# Altium PCB PUMP_MODULE_20230110.PcbDoc (part 3 of 6)
Units mm, origin at the board's own origin, x right, y up, seen from the top; angles counter-clockwise.
Board outline 260.15 x 142.01 mm, 4 copper layers (Top Layer, Mid-Layer 1, Mid-Layer 2, Bottom Layer); 422 components, 240 nets, 1746 pads, 416 vias.
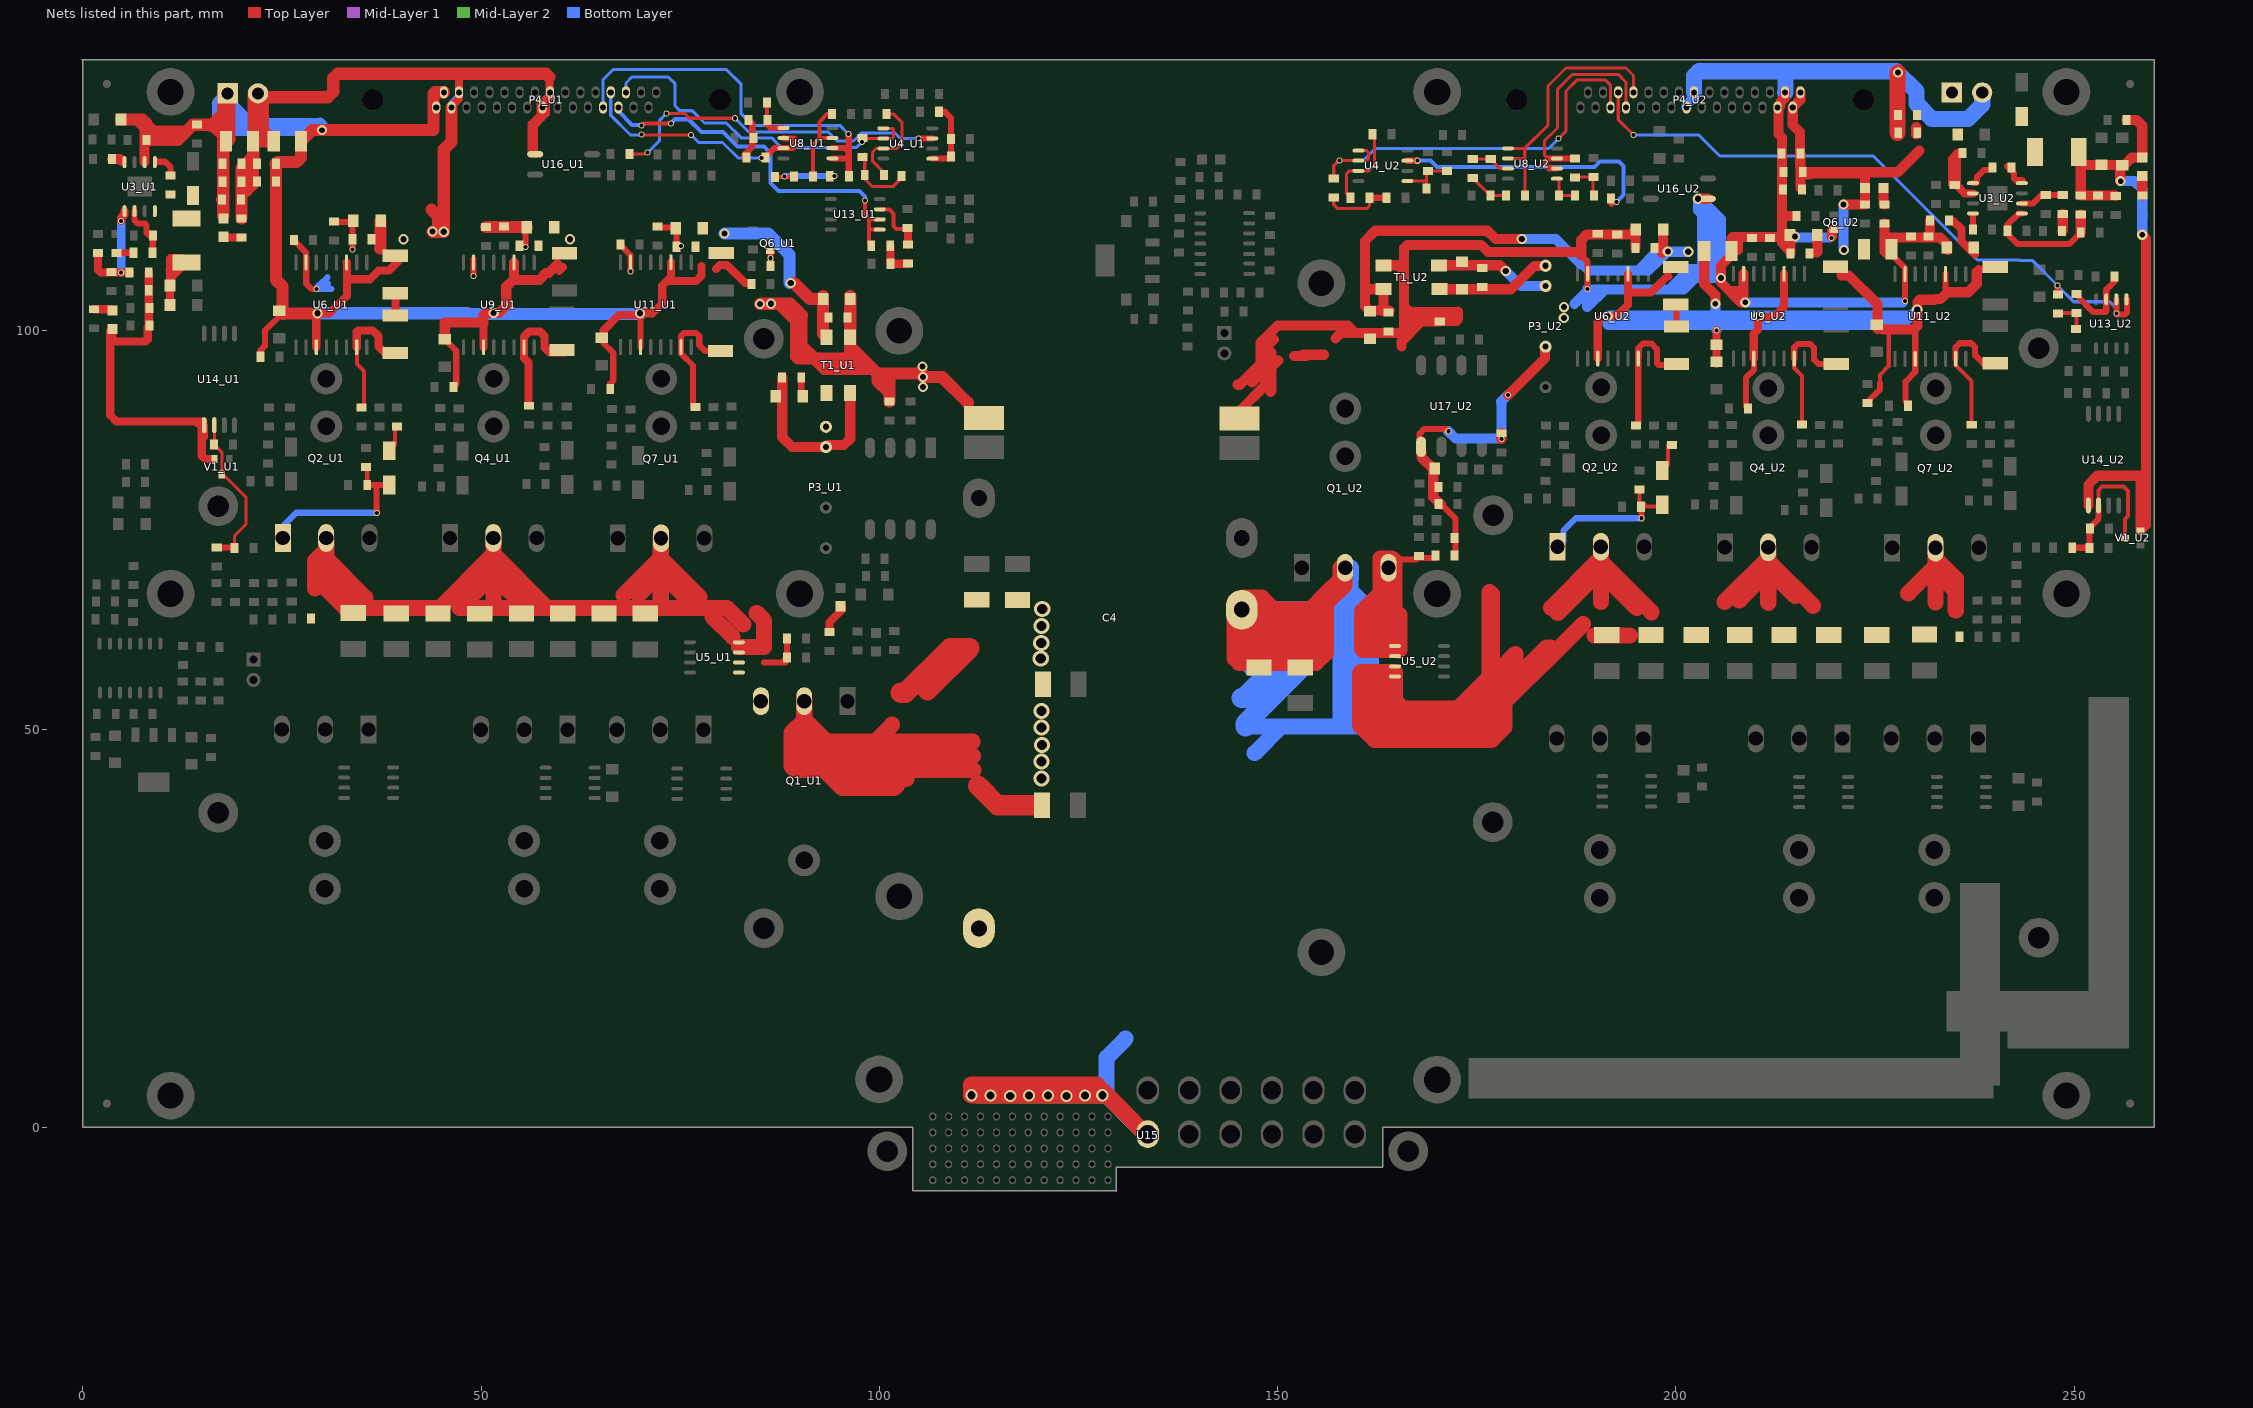
[diagram p5: the nets of this part, all layers, seen from the top]

## Via types
v1: diameter 0.762, hole 0.508, Top Layer to Bottom Layer, 208 vias
v2: diameter 2.032, hole 1.27, Top Layer to Bottom Layer, 78 vias
v3: diameter 1.27, hole 0.762, Top Layer to Bottom Layer, 61 vias
v4: diameter 1.524, hole 1.016, Top Layer to Bottom Layer, 53 vias
v5: diameter 1.27, hole 0.711, Top Layer to Bottom Layer, 16 vias

## Nets (pads, with @x,y where several pads share a name; then routed paths per layer and width w, separated by ;. In a path a pad name is that pad's centre, name@x,y a point inside that pad or via, vN(x,y) a via of type N, cw(c..) or ccw(c..) an arc to the next point about the centre after c; other vN are vias at no path point) (continued)
GND_HVISO_U2: C38_U2.2 C39_U2.2 C40_U2.2 P3_U2.3 R18_U2.2 R34_U2.2 R46_U2.1 U17_U2.5 | length 41.8
  Top Layer w0.762: U17_U2.5@167.818,84.963 167.818,87.097 168.427,87.706 171.12,87.706 v1(171.425,87.401) ; C39_U2.2@170.51,78.181 170.586,78.181 172.339,76.429 R18_U2.2@172.339,72.252
  Top Layer w1.27: U17_U2.5@168.046,84.734 168.046,84.15 169.647,82.55 169.545,82.448 169.545,79.146 C39_U2.2@170.51,78.181 ; v1(178.105,86.436) 178.079,86.462 178.079,86.614 178.105,86.639 R34_U2.2@178.105,87.147 ; v1(178.943,91.948) 183.591,96.596 P3_U2.3@183.591,97.993
  Bottom Layer w1.27: v1(171.425,87.401) 172.339,86.487 177.546,86.487 178.105,87.046 178.105,91.059 178.054,91.11 178.892,91.948 v1(178.943,91.948)
HVCC_IN: C4.1 C17.2 C18.2 C73.2 C74.2 C75.2 C76.2 Q1_U1.2 Q1_U2.2 U15.7 | length 548.8
  Top Layer w2.032: Q1_U1.2@90.572,53.619 Q1_U1.2@90.572,53.518 90.572,51.236 ; 101.6,50.546 99.466,48.412 ; 102.286,43.028 101.854,42.596 95.377,42.596 94.234,43.739 ; 103.378,43.739 94.234,43.739 ; 111.684,48.412 99.466,48.412 ; 111.735,46.634 91.948,46.634 ; 111.785,44.856 93.167,44.856 ; 112.37,4.039 v4(111.557,4.039) v4@111.531,4.013 ; v4@116.713,4.039 119.736,4.039 ; v4@118.745,4.394 118.77,4.394 119.024,4.14 119.837,4.14 ; 121.641,5.41 121.666,5.385 ; v4@123.749,4.039 119.736,4.039 ; 126.797,4.039 v4(127.991,4.039) v4@128.566,4.039 ; v4@128.422,4.14 v4@127.991,4.14 ; U15.7@133.741,-0.837 U15.7@133.7,-0.837 U15.7@133.527,-0.837 ; Q1_U2.2@157.916,70.256 157.916,68.838 156.058,66.98 ; Q1_U2.2@158.475,70.256 158.394,70.176 158.394,68.072 156.058,65.735 ; 88.976,46.812 88.976,49.53 90.572,51.126 ; 88.976,46.812 88.976,45.339 89.459,44.856 90.932,44.856 ; 88.976,46.812 90.932,44.856 ; 90.572,47.68 90.572,47.452 91.948,46.076 ; 90.572,47.68 91.618,46.634 91.948,46.634 ; 90.572,47.68 90.572,49.788 ; 90.572,49.788 90.572,51.126 ; 90.572,49.788 91.948,48.412 ; 90.572,51.126 90.572,51.236 ; 90.572,51.236 93.396,48.412 ; 90.932,44.856 93.116,44.856 ; 91.948,46.076 93.167,44.856 ; 91.948,46.076 91.948,46.634 ; 91.948,46.076 91.948,46.025 93.116,44.856 ; 91.948,46.634 91.948,48.412 ; 91.948,48.412 93.396,48.412 ; 93.116,44.856 94.234,43.739 ; 93.116,44.856 93.167,44.856 ; 93.396,48.412 99.466,48.412 ; v4@111.531,4.013 v4(113.944,4.013) v4(125.806,4.013) 126.619,4.013 v4@126.492,4.14 ; v4@111.531,4.013 111.531,5.385 121.666,5.385 ; 119.736,4.039 119.837,4.14 ; 119.837,4.14 v4@122.911,4.14 ; 121.666,5.385 126.746,5.385 ; 121.666,5.385 v4@122.911,4.14 ; v4@122.911,4.14 v4@126.492,4.14 ; v4@126.492,4.14 v4@127.991,4.14 ; 126.746,5.385 v4@127.991,4.14 ; 126.746,5.385 127.305,5.385 v4@128.651,4.039 ; v4@128.566,4.039 v4@128.651,4.039 ; v4@128.566,4.039 133.442,-0.837 U15.7@133.527,-0.837 ; v4@128.651,4.039 U15.7@133.527,-0.837 ; 144.628,60.96 144.628,58.877 145.186,58.318 154.813,58.318 156.058,59.563 156.058,61.087 ; 144.628,60.96 144.628,64.128 C4.1@145.5,65 ; 144.628,60.96 146.075,59.512 154.28,59.512 154.381,59.411 156.058,61.087 ; C4.1@145.5,63.771 C4.1@145.5,65 ; C4.1@145.5,63.771 145.5,62.399 146.355,61.544 154.635,61.544 156.058,62.967 ; C4.1@145.5,63.771 145.847,63.424 154.864,63.424 156.058,64.618 ; C4.1@145.5,65 149.53,65 ; C4.1@145.5,65 145.5,66.328 145.694,66.523 148.007,66.523 149.53,65 ; 149.53,65 154.078,65 156.058,66.98 ; 156.058,61.087 156.058,62.967 ; 156.058,62.967 156.058,64.618 ; 156.058,64.618 156.058,65.735 ; 156.058,65.735 156.058,66.98
  Top Layer w2.54: 102.692,54.534 102.667,54.559 103.276,54.559 108.89,60.173 111.328,60.173 106.045,54.889 ; 112.395,42.901 114.833,40.462 C76.2@119.913,40.462
  Mid-Layer 1 w2.032: v4@121.717,4.166 121.742,4.14 128.464,4.14 130.461,2.143 130.461,2.127 133.425,-0.837 U15.7@133.7,-0.837 U15.7@133.741,-0.837
  Mid-Layer 2 w2.032: v4@111.76,4.699 125.628,4.699 126.187,4.14 v4@127.94,4.14 ; v4@111.912,4.496 112.37,4.039 v4(127.991,4.039) 128.566,4.039 130.461,2.143 130.461,2.101 133.4,-0.837 U15.7@133.7,-0.837 U15.7@133.741,-0.837 ; 112.09,5.334 126.746,5.334 v4@127.94,4.14 ; v4@128.422,4.14 v4@127.94,4.14
  Bottom Layer w2.032: v4(127.991,4.039) v4@128.525,4.039 ; 130.912,11.151 128.525,8.764 v4@128.525,4.039 ; U15.7@133.7,-0.837 133.4,-0.837 v4@128.525,4.039 ; 145.974,50.343 150.47,50.343 ; 147.117,46.99 150.47,50.343 ; 147.701,61.468 153.34,61.468 154.991,61.468 157.916,64.393 ; 147.777,59.817 147.777,59.842 151.714,59.842 155.092,59.842 155.575,59.842 157.916,62.184 ; 158.043,68.449 Q1_U2.2@158.043,70.256 ; Q1_U2.2@159.182,70.256 159.182,68.991 159.156,69.016 159.156,67.335 159.842,66.65 ; 150.47,50.343 157.302,50.343 ; 157.302,50.343 158.75,50.343 ; 157.302,50.343 157.916,50.957 157.916,62.184 ; 157.916,62.184 157.916,64.393 ; 157.916,64.393 157.916,66.984 ; 157.916,66.984 157.916,68.102 154.814,65 C4.1@145.5,65 147.203,63.297 154.229,63.297 157.916,66.984 ; 158.75,50.343 161.138,50.343 161.722,50.927 161.722,64.77 159.842,66.65 ; 158.75,50.343 159.842,51.435 159.842,66.65
  Bottom Layer w2.54: 145.466,53.899 145.771,53.899 149.835,57.963 ; 145.974,50.343 145.974,50.724 155.092,59.842 ; 146.812,57.963 149.835,57.963 ; 153.34,61.468 151.714,59.842 149.835,57.963
  other v2: 120.345,43.815 120.345,45.923 120.421,48.006 120.371,50.19 120.371,52.299 120.269,58.852 120.32,60.808 120.345,62.967 120.447,65.1
  other v4: 116.434,3.962 123.495,3.962 118.796,3.988 121.158,3.988
HVCC_U1: C15_U1.2 C16_U1.2 C20_U1.2 C70_U1.2 C71_U1.2 C72_U1.2 C77_U1.2 C78_U1.2 Q2_U1.2 Q4_U1.2 Q7_U1.2 R74_U1.2 U5_U1.3 U5_U1.4 | length 159.1
  Top Layer w2.032: Q2_U1.2@30.56,74 Q2_U1.2@30.56,72.517 ; 33.604,66.497 30.56,69.541 ; 35.484,66.497 30.56,71.421 ; Q4_U1.2@51.56,74 51.56,71.935 ; 67.894,66.853 72.56,71.519 ; 69.774,66.878 72.56,69.664 ; Q7_U1.2@72.56,74 72.56,71.519 ; 76.048,66.269 72.56,69.756 ; 77.419,66.573 72.56,71.433 ; 79.045,64.135 81.585,61.595 ; 82.423,60.3 85.522,60.3 85.522,63.652 84.582,64.592 ; 82.906,63.17 80.848,65.227 72.644,65.227 ; 30.56,69.041 30.56,69.541 ; 30.56,69.041 30.56,67.611 32.944,65.227 44.856,65.227 51.56,71.931 ; 30.56,69.041 29.159,67.64 29.159,71.116 Q2_U1.2@30.56,72.517 ; 30.56,69.541 30.56,71.421 ; 30.56,71.421 Q2_U1.2@30.56,72.517 ; 51.56,69.344 51.56,65.483 51.816,65.227 ; 51.56,69.344 C72_U1.2@55.677,65.227 ; 51.56,69.344 51.56,69.492 ; 51.56,69.492 51.56,71.931 ; 51.56,69.492 47.295,65.227 51.816,65.227 ; 51.56,71.931 51.56,71.935 ; 51.56,71.935 58.268,65.227 ; 51.816,65.227 C72_U1.2@55.677,65.227 ; C72_U1.2@55.677,65.227 58.268,65.227 ; 58.268,65.227 72.644,65.227 ; 72.56,69.664 72.56,69.756 ; 72.56,69.664 72.56,65.311 72.644,65.227 ; 72.56,69.756 72.56,71.433 ; 72.56,71.433 72.56,71.519
HVCC_U2: C15_U2.2 C16_U2.2 C20_U2.2 C70_U2.2 C71_U2.2 C72_U2.2 C77_U2.2 C78_U2.2 Q2_U2.2 Q4_U2.2 Q7_U2.2 R74_U2.2 U5_U2.3 U5_U2.4 | length 255.8
  Top Layer w2.032: 172.822,52.73 175.514,55.423 ; 174.142,52.73 175.514,54.102 175.514,55.423 ; 174.6,51.054 176.581,53.035 ; 176.047,52.553 165.76,52.553 164.744,53.569 U5_U2.4@164.744,56.617 164.744,57.15 163.271,57.15 ; 176.505,50.876 178.283,52.654 ; 183.248,58.102 188.341,63.195 ; 184.252,60.249 183.794,60.249 179.857,56.312 ; 184.353,65.253 Q2_U2.2@190.601,71.501 ; 184.506,59.411 178.46,53.365 178.46,50.241 176.886,48.666 174.295,48.666 ; 185.166,64.567 190.601,70.002 ; C16_U2.2@189.763,61.747 194.208,61.747 ; 190.601,65.964 190.601,69.723 ; Q2_U2.2@190.601,72.83 Q2_U2.2@190.601,71.501 ; 195.123,65.202 190.601,69.723 ; 196.952,64.668 190.601,71.019 ; 206.096,65.964 Q4_U2.2@211.601,71.47 ; 207.95,66.167 211.601,69.819 ; Q4_U2.2@211.601,72.83 Q4_U2.2@211.601,71.47 ; 211.633,65.862 211.601,65.894 211.601,69.819 ; 215.011,66.7 211.601,70.11 ; 217.221,65.481 Q4_U2.2@211.601,71.101 ; 229.184,67.031 229.159,67.056 232.601,70.499 ; 232.588,65.938 232.601,65.952 232.601,69.862 ; Q7_U2.2@232.601,72.83 Q7_U2.2@232.601,71.411 ; 235.052,67.412 232.601,69.862 ; 235.128,64.897 235.128,68.885 Q7_U2.2@232.601,71.411 ; 161.036,49.809 162.179,48.666 164.694,48.666 ; 161.036,49.809 163.551,49.809 ; 161.036,49.809 160.35,50.495 160.35,57.023 160.477,57.15 161.747,57.15 ; 161.747,57.15 161.417,56.82 161.417,51.943 163.551,49.809 ; 161.747,57.15 163.271,57.15 ; 163.271,57.15 163.271,52.248 164.871,50.648 176.276,50.648 174.295,48.666 ; 163.551,49.809 164.694,48.666 ; 164.694,48.666 174.295,48.666 ; 175.514,55.423 176.581,56.49 ; 176.581,53.035 176.581,56.49 ; 176.581,53.035 178.079,54.534 ; 176.581,56.49 176.911,56.82 176.911,66.904 176.581,67.234 176.581,56.49 ; 178.079,54.534 179.857,56.312 ; 178.079,54.534 178.079,57.658 179.857,59.436 179.857,56.312 ; 190.601,69.723 190.601,70.002 ; 190.601,70.002 190.601,71.019 ; 190.601,71.019 Q2_U2.2@190.601,71.501 ; 211.601,69.819 211.601,70.11 ; 211.601,70.11 Q4_U2.2@211.601,71.101 ; Q4_U2.2@211.601,71.101 Q4_U2.2@211.601,71.47 ; 232.601,69.862 232.601,70.499 ; 232.601,70.499 Q7_U2.2@232.601,71.411
HVCCIN_U1: Q1_U1.3 R15_U1.1 R18_U1.1 U5_U1.1 U5_U1.2 | length 6
  Top Layer w0.762: 85.547,58.344 87.757,58.344 ; 88.189,58.344 87.757,58.344 ; R18_U1.1@88.417,61.392 R15_U1.1@88.417,59.004 87.757,58.344
HVCCIN_U2: Q1_U2.3 R15_U2.1 R18_U2.1 U5_U2.1 U5_U2.2 | length 66.2
  Top Layer w0.762: Q1_U2.3@163.356,70.256 164.423,71.323 R15_U2.1@167.411,71.323 ; R15_U2.1@167.361,71.526 167.386,71.501 R18_U2.1@169.774,71.501
  Top Layer w2.032: Q1_U2.3@163.297,69.901 163.297,67.462 162.916,67.081 ; Q1_U2.3@163.356,70.256 163.356,66.26 ; Q1_U2.3@163.483,70.256 Q1_U2.3@163.944,69.795 ; 161.722,59.969 160.757,59.969 160.63,60.096 160.63,64.795 162.916,67.081 ; 161.722,59.969 163.525,59.969 ; 161.722,59.969 161.671,60.02 161.671,64.592 163.347,66.269 ; 162.916,67.081 162.916,71.425 164.321,71.425 164.423,71.323 164.643,71.103 Q1_U2.3@164.643,69.097 ; 162.916,67.081 162.916,66.7 163.347,66.269 ; 163.347,66.269 163.347,60.147 163.525,59.969 ; 163.347,66.269 163.356,66.26 ; 163.356,66.26 163.944,65.672 ; 163.525,59.969 165.151,59.969 165.227,59.893 165.261,59.927 165.261,64.355 164.643,64.973 ; 163.944,65.672 164.643,64.973 ; 163.944,65.672 Q1_U2.3@163.944,69.795 ; Q1_U2.3@163.944,69.795 Q1_U2.3@164.643,69.097 ; 164.643,64.973 Q1_U2.3@164.643,69.097
II_1_AC1_U1: C45_U1.2 P4_U1.12 U8_U1.1 U8_U1.2 | length 50
  Top Layer w0.762: U8_U1.1@94.107,121.666 96.164,121.666 ; U8_U1.2@94.107,122.936 95.733,122.936 96.164,122.504 ; v1(96.139,124.714) 96.164,124.689 96.164,122.504 ; C45_U1.2@96.164,119.405 96.164,121.666 ; 96.164,121.666 96.164,122.504
  Bottom Layer w0.381: P4_U1.12@65.329,128.047 65.329,131.546 66.573,132.791 80.823,132.791 82.652,130.962 82.652,127.254 84.099,125.806 95.047,125.806 v1(96.139,124.714)
II_1_AC1_U2: C45_U2.2 P4_U2.12 U8_U2.1 U8_U2.2 | length 33.3
  Top Layer w0.381: U8_U2.2@178.918,121.641 181.026,121.641 ; U8_U2.1@178.918,122.911 181.026,122.911 ; C45_U2.2@181.077,116.992 181.077,121.996 181.026,122.047 181.026,122.911 ; P4_U2.12@194.668,129.952 194.668,132.052 193.726,132.994 186.207,132.994 183.947,130.734 183.947,125.832 181.026,122.911
II_1_AC2_U1: C48_U1.2 P4_U1.27 U8_U1.6 U8_U1.7 | length 31
  Top Layer w0.381: v1(70.155,124.663) 70.206,124.612 73.558,124.612 ; 73.584,124.587 73.558,124.612 ; v1@76.352,124.562 76.302,124.612 73.558,124.612
  Top Layer w0.762: C48_U1.2@85.471,121.691 85.573,121.691 86.817,122.936 U8_U1.7@87.96,122.936 89.103,122.936 89.332,123.165 89.332,124.054 89.306,124.079 89.306,124.155 88.011,124.155 U8_U1.6@87.96,124.206
  Bottom Layer w0.381: P4_U1.27@66.281,129.952 66.282,127.063 68.758,124.587 v1@70.155,124.587 ; v1(76.352,124.612) 77.318,123.647 80.315,123.647 82.271,121.691 v1(85.192,121.691)
II_1_AC2_U2: C48_U2.2 P4_U2.27 U8_U2.6 U8_U2.7 | length 28.4
  Top Layer w0.381: 183.972,121.641 183.947,121.641 183.49,122.098 183.49,123.825 185.141,125.476 185.141,130.327 187.02,132.207 192.761,132.207 193.716,131.252 P4_U2.27@193.716,128.047
  Top Layer w0.762: U8_U2.6@185.064,120.371 184.099,120.371 183.718,120.752 183.718,121.387 183.972,121.641 U8_U2.7@185.064,121.641 187.3,121.641 C48_U2.2@187.325,121.666
II_1_AC3_U1: C61_U1.2 P4_U1.13 U13_U1.1 U13_U1.2 | length 48.1
  Top Layer w0.508: v1(70.155,125.806) 70.383,126.035 73.838,126.035 v1(73.838,126.06) ; v1(98.222,116.357) 98.222,114.605 98.831,113.995 ; C61_U1.2@98.984,110.693 98.679,110.998 98.679,112.7 ; U13_U1.1@100.051,112.725 98.704,112.725 98.679,112.7 ; U13_U1.2@100.051,113.995 98.831,113.995 ; 98.679,112.7 98.679,113.843 98.831,113.995
  Bottom Layer w0.508: P4_U1.13@67.234,128.047 67.234,127.584 68.961,125.857 70.104,125.857 v1@70.206,125.755 ; v1@73.838,126.035 74.371,126.568 76.048,126.568 77.673,124.943 80.391,124.943 82.182,123.152 85.534,123.152 86.335,122.352 86.335,118.593 87.351,117.577 97.536,117.577 98.222,116.891 v1(98.222,116.357)
II_1_AC3_U2: C61_U2.2 P4_U2.13 U13_U2.1 U13_U2.2 | length 82.6
  Top Layer w0.381: P4_U2.13@192.763,129.952 192.763,126.515 v1(194.691,124.587) v1@194.615,124.663
  Top Layer w0.762: v1(247.904,105.689) 247.904,104.597 C61_U2.2@247.955,104.546 ; U13_U2.2@255.295,103.962 v1(255.295,102.184) 255.397,102.083 256.388,102.083 256.616,102.311 256.616,103.911 U13_U2.1@256.565,103.962
  Bottom Layer w0.381: v1(194.691,124.587) 202.87,124.587 205.511,121.945 ; 205.537,121.945 224.79,121.945 237.846,108.89 243.129,108.89 243.154,108.864 244.729,108.864 v1(247.904,105.689) 249.936,103.657 254.457,103.657 255.295,102.819 v1(255.295,102.184)
  Bottom Layer w0.762: v1@247.879,105.664 v1(247.904,105.689)
II_1_DC1_U1: C31_U1.2 P4_U1.28 U4_U1.1 U4_U1.2 | length 42.7
  Top Layer w0.381: C31_U1.2@98.222,124.155 U4_U1.2@100.508,124.155 101.625,124.155 101.778,124.308 101.778,125.349 101.702,125.425 U4_U1.1@100.508,125.425
  Bottom Layer w0.381: P4_U1.28@68.186,129.952 68.186,131.127 68.936,131.877 73.508,131.877 74.371,131.013 74.371,128.27 74.346,128.245 74.955,127.635 76.505,127.635 78.054,126.086 80.797,126.086 82.652,124.231 86.487,124.231 87.02,123.698 87.681,123.038 97.155,123.038 v1(97.815,123.698)
II_1_DC1_U2: C31_U2.2 P4_U2.28 U4_U2.1 U4_U2.2 | length 52.9
  Top Layer w0.381: C31_U2.2@157.048,119.126 157.048,120.726 157.683,121.361 U4_U2.2@160.147,121.361 160.172,121.387 161.239,121.387 161.417,121.564 161.417,122.403 161.188,122.631 U4_U2.1@160.147,122.631 U4_U2.1@160.223,122.707 ; v1(185.268,124.13) 186.207,125.07 186.207,125.832 ; 186.182,125.806 186.207,125.832 ; P4_U2.28@191.811,128.047 191.811,130.846 191.186,131.47 187.554,131.47 186.207,130.124 186.207,125.832
  Bottom Layer w0.381: v1(157.785,121.387) 160.757,121.387 162.255,122.885 184.023,122.885 v1(185.268,124.13)
II_FLT_U1: R86_U1.1 U4_U1.7 | length 43.6
  Top Layer w0.381: R86_U1.1@68.656,122.199 70.51,122.199 v1@70.752,122.441 ; v1(73.279,127.305) 75.54,127.305 76.149,126.695 v1(81.89,126.695)
  Top Layer w0.762: v1(104.902,124.155) U4_U1.7@106.655,124.155
  Bottom Layer w0.381: v1(70.891,122.377) 72.415,123.901 72.415,126.441 v1(73.279,127.305) ; v1(81.89,126.695) 83.617,124.968 93.574,124.968 94.691,123.85 96.749,123.85 97.739,124.841 101.168,124.841 101.956,124.841 102.641,124.155 v1(104.902,124.155)
II_FLT_U2: R86_U2.1 U4_U2.7 | length 33.6
  Top Layer w0.762: U4_U2.7@166.294,121.361 v1(167.538,121.361) ; 191.922,115.926 192.176,116.18 v1(192.557,116.18)
  Bottom Layer w0.508: v1(167.538,121.361) 169.215,121.361 170.002,120.574 189.763,120.574 190.449,121.26 192.862,121.26 193.421,120.701 193.421,117.043 v1(192.557,116.18)
ISO_+5V_U1: C21_U1.1 C22_U1.1 C23_U1.1 C29_U1.2 C30_U1.2 D3_U1.1 L1_U1.1 R20_U1.2 U14_U1.1 V1_U1.2 | length 56.4
  Top Layer w1.016: C23_U1.1@8.28,107.315 R20_U1.2@8.28,105.105 8.28,100.787 C30_U1.2@8.382,100.686 8.153,100.457 8.153,98.933 7.899,98.679 3.912,98.679 3.708,98.882 D3_U1.1@3.708,100.228 3.454,99.974 3.454,89.408 4.242,88.621 14.224,88.621 ; 10.922,107.721 10.947,107.696 ; C22_U1.1@10.947,103.251 C21_U1.1@10.947,105.715 10.947,106.68 ; U14_U1.1@15.164,88.621 14.224,88.621 ; U14_U1.1@15.189,88.113 15.189,86.665 14.935,86.411 ; V1_U1.2@16.281,83.896 15.342,83.896 14.935,84.303 14.935,86.411 ; 10.947,106.68 10.947,107.696 ; 10.947,106.68 11.074,106.68 L1_U1.1@13.005,108.61 12.497,109.118 10.998,109.118 10.947,109.068 10.947,107.696 ; 14.224,88.621 14.935,87.909 14.935,86.411
ISO_+5V_U2: C21_U2.1 C22_U2.1 C23_U2.1 C29_U2.2 C30_U2.2 D3_U2.1 L1_U2.1 R20_U2.2 U14_U2.1 V1_U2.2 | length 94
  Top Layer w0.508: 253.34,81.509 257.785,81.509
  Top Layer w1.27: L1_U2.1@250.571,122.479 250.571,121.361 L1_U2.1@250.825,121.107 ; U14_U2.1@251.79,78.08 251.79,80.721 252.882,81.813 258.318,81.813 V1_U2.2@258.318,74.955 259.007,75.644 259.007,111.605 v5(258.547,112.065) ; C29_U2.2@255.219,116.942 255.143,117.018 C23_U2.1@250.825,117.018 L1_U2.1@250.825,121.107 ; v5(255.829,118.796) 255.778,118.847 255.778,120.548 C22_U2.1@256.032,120.802 ; C30_U2.2@256.565,126.492 257.81,126.492 258.547,125.755 D3_U2.1@258.547,121.742 257.226,121.742 256.311,120.828 C21_U2.1@253.416,120.828 251.104,120.828 L1_U2.1@250.825,121.107
  Bottom Layer w1.27: v5(255.829,118.796) 257.556,118.796 258.547,117.805 v5(258.547,112.065)
ISO_+15V_U1: C5_U1.1 C6_U1.1 C7_U1.2 C8_U1.2 C9_U1.2 C10_U1.2 C11_U1.2 C19_U1.1 C24_U1.1 C25_U1.2 C34_U1.1 C35_U1.1 C41_U1.1 C42_U1.1 C43_U1.1 C44_U1.1 C49_U1.1 C50_U1.1 C51_U1.1 C52_U1.1 C66_U1.1 C67_U1.1 C68_U1.1 D1_U1.1 D6_U1.1 D11_U1.1 D16_U1.1 P2_U1.1 P4_U1.1 P4_U1.16 R17_U1.1 R51_U1.2 T1_U1.2 U3_U1.2 U6_U1.3 U6_U1.11 U9_U1.3 U9_U1.11 U11_U1.3 U11_U1.11 | length 314.3
  Top Layer w0.762: C68_U1.1@22.327,96.749 22.327,97.587 22.86,98.12 22.86,100.025 25.019,102.184 C43_U1.1@25.095,102.184 ; C51_U1.1@45.441,98.933 46.888,97.485 46.888,93.32 C44_U1.1@46.533,92.964 ; C19_U1.1@65.354,99.162 65.354,98.476 66.599,97.231 66.599,93.751 66.218,93.37 C52_U1.1@66.218,92.71 ; v3@70.002,101.981 70.002,102.006 70.028,101.981 U11_U1.3@70.028,97.968
  Top Layer w1.016: 24.181,106.324 24.257,106.401 ; U6_U1.3@29.312,97.942 29.312,102.057 29.439,102.184 v3(29.464,102.21) 30.988,102.21 33.147,104.369 33.147,108.567 U6_U1.11@33.122,108.592 ; 33.241,106.477 36.068,106.477 37.16,107.569 ; 37.668,107.594 38.456,107.594 D6_U1.1@39.624,108.763 ; U9_U1.3@50.317,97.942 50.317,100.94 ; 59.817,107.518 60.3,108.001 ; C19_U1.1@65.227,98.882 C19_U1.1@65.253,98.908 ; C19_U1.1@65.354,99.162 65.354,100.051 67.285,101.981 70.002,101.981 v3@70.028,101.981 ; v3(69.952,102.21) 71.526,102.21 72.746,103.429 72.746,105.689 73.33,106.274 ; U11_U1.11@73.838,108.618 73.838,106.782 73.33,106.274 ; 77.673,108.128 77.673,106.934 77.013,106.274 73.33,106.274 ; 79.502,107.772 80.01,108.28 80.874,108.28 83.16,105.994 R51_U1.2@83.541,105.994
  Top Layer w1.27: 6.68,126.517 7.772,125.425 U3_U1.2@7.772,121.183 ; C51_U1.1@45.441,98.933 45.441,101.016 45.491,101.067 50.19,101.067 50.317,100.94 50.317,101.956 50.597,102.235 v3(51.587,102.235) 52.222,102.235 53.162,103.175 53.162,105.537 54.127,106.502 U9_U1.11@54.127,108.592 ; 54.407,106.375 57.328,106.375 57.785,106.832 57.785,106.909 58.166,107.29 58.522,107.29 59.563,108.331
  Top Layer w1.524: C24_U1.1@4.801,126.517 6.68,126.517 7.518,126.517 8.001,126.035 8.001,125.882 8.839,125.044 ; 8.001,125.73 8.001,125.298 ; 16.078,125.73 16.231,125.882 ; C10_U1.2@17.501,116.484 C10_U1.2@17.628,116.611 ; D1_U1.1@17.628,114.452 C10_U1.2@17.628,116.611 ; P2_U1.1@17.628,129.845 17.628,127.279 ; C43_U1.1@25.07,102.641 25.07,105.588 24.257,106.401 C8_U1.2@24.257,118.77 24.257,120.955 C9_U1.2@24.232,120.98 24.46,121.209 26.848,121.209 27.407,121.768 C5_U1.1@27.407,123.8 28.804,125.197 v5(30.023,125.197) 44.044,125.197 44.044,129.794 44.202,129.952 P4_U1.16@45.326,129.952 ; C43_U1.1@25.095,102.184 C43_U1.1@25.171,102.108 ; C43_U1.1@25.375,102.184 v3@29.439,102.184 ; 37.338,110.363 37.389,110.414 C49_U1.1@37.389,113.817 ; v3@89.281,106.02 91.288,104.013 C34_U1.1@92.913,104.013 ; C34_U1.1@92.913,104.394 C34_U1.1@92.913,104.013 ; C34_U1.1@92.939,104.013 C34_U1.1@92.913,104.013 ; T1_U1.2@93.345,99.202 92.913,99.634 C34_U1.1@92.913,104.013 ; 8.001,125.298 R17_U1.1@8.001,123.977 9.855,123.977 ; 8.001,125.298 8.255,125.044 8.839,125.044 ; 8.839,125.044 9.881,124.003 9.855,123.977 ; 8.839,125.044 13.005,125.044 ; 9.855,123.977 11.938,123.977 13.005,125.044 ; 13.005,125.044 13.843,125.882 C25_U1.2@14.351,125.882 16.231,125.882 ; 16.231,125.882 C6_U1.1@17.628,124.485 ; 16.231,125.882 17.628,125.882 ; 16.231,125.882 17.628,127.279 ; C10_U1.2@17.628,116.611 C6_U1.1@17.628,124.485 ; C6_U1.1@17.628,124.485 17.628,125.882 ; C6_U1.1@17.628,124.485 17.958,124.155 C6_U1.1@17.958,123.8 18.212,123.8 18.44,124.028 18.44,129.565 P2_U1.1@18.186,129.819 18.186,127.838 17.628,127.279 ; 17.628,125.882 17.628,127.279
  Bottom Layer w1.524: 21.895,125.197 21.869,125.197 ; v3@29.743,102.21 48.285,102.21 48.362,102.133 v3@70.002,102.133 ; v3(80.569,112.217) 86.055,112.217 88.722,109.55 v3@88.722,106.045 ; 18.186,125.908 16.967,127.127 16.967,128.6 P2_U1.1@18.186,129.819 P2_U1.1@18.186,128.88 ; 18.186,125.908 18.186,127.686 ; 18.186,125.908 18.898,125.197 21.869,125.197 ; 18.186,127.686 P2_U1.1@18.186,128.88 ; 18.186,127.686 19.888,125.984 21.082,125.984 ; P2_U1.1@18.186,128.88 21.082,125.984 ; 21.082,125.984 29.743,125.984 29.769,126.009 30.023,125.755 v5(30.023,125.197) 21.869,125.197 ; 21.082,125.984 21.869,125.197
  other v3: 88.875,105.994 40.284,111.506 61.189,111.506
ISO_+15V_U2: C5_U2.1 C6_U2.1 C7_U2.2 C8_U2.2 C9_U2.2 C10_U2.2 C11_U2.2 C19_U2.1 C24_U2.1 C25_U2.2 C34_U2.1 C35_U2.1 C41_U2.1 C42_U2.1 C43_U2.1 C44_U2.1 C49_U2.1 C50_U2.1 C51_U2.1 C52_U2.1 C66_U2.1 C67_U2.1 C68_U2.1 D1_U2.1 D6_U2.1 D11_U2.1 D16_U2.1 P2_U2.1 P4_U2.1 P4_U2.16 R17_U2.1 R51_U2.2 T1_U2.2 U3_U2.2 U6_U2.3 U6_U2.11 U9_U2.3 U9_U2.11 U11_U2.3 U11_U2.11 | length 325.2
  Top Layer w0.508: 225.628,93.421 225.628,94.488 226.72,95.58 226.72,100.051 226.822,100.152
  Top Layer w0.762: C43_U2.1@205.08,96.672 C43_U2.1@205.207,96.545 ; C44_U2.1@209.067,90.246 208.788,90.526 208.788,94.093 209.779,95.083 U9_U2.3@209.779,96.469 ; U9_U2.3@209.702,96.545 U9_U2.3@209.779,96.469 ; U9_U2.3@209.779,96.52 U9_U2.3@209.779,96.469 ; C68_U2.1@224.053,90.932 224.053,91.097 225.628,92.672 225.628,93.421 ; C52_U2.1@229.032,90.907 228.829,91.11 228.829,93.624 230.048,94.844 U11_U2.3@230.048,96.495 230.048,99.974 229.87,100.152 ; U11_U2.11@233.858,107.145 233.858,105.08 234.086,104.851
  Top Layer w1.016: U6_U2.3@190.195,96.52 190.195,101.143 190.906,101.854 v3(191.44,101.854) 192.557,101.854 193.319,102.616 193.345,102.616 194.005,103.276 194.005,104.8 ; U6_U2.11@194.005,107.17 194.005,104.8 ; 199.06,106.858 198.907,106.858 197.561,105.512 196.85,104.8 194.005,104.8 ; C43_U2.1@205.08,95.834 205.08,96.672 C51_U2.1@205.08,98.273 v1(205.08,100.076) ; U9_U2.3@209.779,96.52 209.779,99.67 210.287,100.178 210.287,101.295 210.744,101.752 212.344,101.752 213.589,102.997 U9_U2.11@213.589,107.17 ; C50_U2.1@234.29,113.868 234.747,113.868 235.839,112.776 235.839,111.252 237.515,109.576 ; R17_U2.1@235.331,118.186 236.245,117.272 U3_U2.2@237.287,117.272 ; 235.356,122.326 235.28,122.25 ; 235.28,122.25 235.28,118.618 R17_U2.1@235.001,118.339 234.721,118.339 234.696,118.364 234.696,121.666 235.28,122.25
  Top Layer w1.27: C35_U2.1@164.008,102.54 C35_U2.1@163.307,102.54 ; v3(180.645,111.531) 177.368,111.531 176.327,112.573 162.255,112.573 160.96,111.277 160.96,105.689 ; 198.247,109.753 198.399,109.906 C41_U2.1@198.399,112.725 ; C6_U2.1@203.556,109.449 203.556,105.893 204.953,104.496 v5@204.953,103.632 ; C8_U2.2@215.621,117.958 C11_U2.2@215.621,120.523 ; C7_U2.2@215.621,122.276 C11_U2.2@215.621,120.523 ; P4_U2.1@215.623,129.952 215.623,128.999 P4_U2.16@214.671,128.047 214.671,125.841 215.57,124.943 215.57,120.574 C11_U2.2@215.621,120.523 ; 217.678,109.855 217.754,109.931 C66_U2.1@217.754,112.039 ; 220.802,106.934 221.742,106.934 225.323,103.353 C19_U2.1@225.323,100.787 ; v3@221.056,115.875 221.082,115.849 R51_U2.2@223.749,115.849 D1_U2.1@223.749,117.958 223.749,119.761 ; C19_U2.1@225.323,100.228 C19_U2.1@225.323,100.787 ; C10_U2.2@230.175,124.638 230.175,125.603 ; 230.556,122.631 227.838,119.913 223.901,119.913 ; 238.049,107.645 237.769,107.366 237.769,105.918 236.703,104.851 234.086,104.851 233.223,103.988 232.512,103.988 232.435,103.911 230.607,103.911 230.327,103.632 230.327,100.609 229.87,100.152 226.822,100.152 225.958,100.152 C19_U2.1@225.323,100.787 ; 160.96,105.689 160.96,103.099 C34_U2.1@161.62,102.438 161.722,102.54 163.246,102.54 ; 160.96,105.689 161.417,105.232 T1_U2.2@163.307,105.232 C35_U2.1@163.307,102.54 ; 163.246,102.54 C35_U2.1@163.307,102.54 ; 163.246,102.54 163.307,102.479 C35_U2.1@163.307,102.54 ; C11_U2.2@215.621,120.523 C11_U2.2@216.23,119.913 ; C11_U2.2@216.23,119.913 216.51,119.634 216.789,119.634 216.916,119.761 223.749,119.761 ; C11_U2.2@216.23,119.913 223.901,119.913 ; 223.749,119.761 223.901,119.913
  Bottom Layer w1.27: v3(180.645,111.531) 184.912,111.531 188.087,108.356 ; 188.087,108.509 189.027,107.569 195.25,107.569 ; 198.069,109.245 197.574,108.75 ; v3@198.984,109.931 v3(201.549,109.931) ; v5@204.953,103.251 204.953,101.905 ; v1(205.08,100.076) 205.08,100.762 ; v3@221.031,110.16 v3(221.031,115.875) ; v3(230.302,102.667) 229.54,101.905 ; 195.25,107.569 196.393,107.569 ; 195.25,107.569 197.663,109.982 v3(198.984,109.982) 197.752,108.75 ; 196.393,107.569 196.571,107.569 197.752,108.75 ; 196.393,107.569 197.574,108.75 ; 197.574,108.75 197.752,108.75 ; 204.953,101.905 229.54,101.905 ; 204.953,101.905 191.491,101.905 v3(191.44,101.854) 191.44,100.787 191.465,100.762 205.08,100.762 ; 204.953,101.905 205.08,101.778 205.08,100.762 ; 205.08,100.762 228.397,100.762 229.54,101.905
  other v3: 210.337,101.854 221.107,110.16
  other v5: 204.953,103.403
ISO_GND_U1: C5_U1.2 C6_U1.2 C7_U1.1 C8_U1.1 C9_U1.1 C10_U1.1 C11_U1.1 C34_U1.2 C35_U1.2 C41_U1.2 C42_U1.2 C49_U1.2 C50_U1.2 C66_U1.2 C67_U1.2 P2_U1.2 P4_U1.2 P4_U1.8 P4_U1.17 P4_U1.23 Q6_U1.2 R8_U1.1 R21_U1.1 R31_U1.2 R33_U1.2 R45_U1.1 R48_U1.2 R50_U1.2 R58_U1.1 R63_U1.2 R65_U1.2 T1_U1.4 U6_U1.15 U9_U1.15 U11_U1.15 U16_U1.4 | length 243.9
  Top Layer w0.762: R33_U1.2@26.543,111.404 26.543,111.303 28.042,109.804 U6_U1.15@28.042,108.592 28.042,105.943 28.067,105.918 ; U6_U1.15@28.067,109.296 28.067,105.918 ; v1(29.337,105.232) 28.753,105.232 28.067,105.918 ; R31_U1.2@31.775,113.665 C49_U1.2@33.731,113.665 ; v1(33.884,110.236) C67_U1.2@33.884,111.404 ; C49_U1.2@33.884,113.64 C67_U1.2@33.884,111.404 ; C49_U1.2@33.96,113.817 C49_U1.2@34.138,113.64 ; C67_U1.2@33.985,111.506 C67_U1.2@33.884,111.404 ; v1(49.047,106.883) U9_U1.15@49.047,109.009 ; R48_U1.2@52.857,113.081 C66_U1.2@55.27,113.081 ; C50_U1.2@54.839,110.693 55.448,110.693 v1(55.601,110.541) 55.601,112.852 C66_U1.2@55.753,113.005 ; P4_U1.23@58.661,129.952 P4_U1.23@58.661,129.781 ; R65_U1.2@67.513,110.846 67.513,110.744 68.758,109.499 U11_U1.15@68.758,108.618 v1(68.758,107.442) ; R63_U1.2@72.593,112.954 C41_U1.2@74.371,112.954 ; C42_U1.2@74.524,110.922 74.524,112.065 ; Q6_U1.2@86.309,109.83 86.36,109.779 v1(86.36,109.118) R58_U1.1@86.36,108.001 ; 57.328,127.102 57.328,128.448 57.709,128.829 ; 57.328,127.102 P4_U1.8@57.709,127.483 ; 57.328,127.102 56.236,126.009 56.236,122.25 56.363,122.123 56.972,122.123 56.744,122.352 56.744,125.705 57.709,126.67 ; 57.709,126.67 58.268,127.229 58.268,128.676 ; 57.709,126.67 P4_U1.8@57.709,127.483 ; P4_U1.8@57.709,127.483 P4_U1.8@57.709,128.047 P4_U1.8@57.709,128.118 ; P4_U1.8@57.709,128.118 58.268,128.676 ; P4_U1.8@57.709,128.118 57.709,128.829 ; 57.709,128.829 P4_U1.23@58.661,129.781 ; 58.268,128.676 58.661,129.07 P4_U1.23@58.661,129.781
  Top Layer w1.016: P4_U1.2@46.279,128.047 46.279,128.192 47.231,129.144 P4_U1.17@47.231,129.952 47.231,132.143 47.371,132.283 ; 58.572,131.851 58.572,129.87 P4_U1.23@58.661,129.781
  Top Layer w1.524: R8_U1.1@19.939,114.097 19.914,114.122 19.914,117.577 ; C9_U1.1@21.438,120.675 21.438,121.971 ; 43.764,115.24 44.577,114.427 ; v3(43.891,112.471) 43.917,112.446 v3@45.085,112.446 ; P4_U1.2@46.279,128.047 46.279,123.749 45.314,122.784 v3(45.314,112.446) v3@45.085,112.446 ; R50_U1.2@50.622,113.03 55.728,113.03 C66_U1.2@55.753,113.005 ; 58.572,131.851 58.141,132.283 47.371,132.283 32.004,132.283 31.445,131.724 31.445,130.023 30.759,129.337 P2_U1.2@21.946,129.337 ; v3(85.039,103.378) 85.065,103.403 v3(86.385,103.403) 87.401,103.403 ; C34_U1.2@96.342,104.394 96.345,104.391 T1_U1.4@96.345,99.202 96.345,98.067 ; 100.889,94.336 101.295,93.929 101.295,92.177 ; R45_U1.1@101.295,91.161 101.295,92.177 ; v3@105.385,94.691 105.334,94.64 99.771,94.64 ; v3(105.461,94.209) 107.874,94.209 111.1,90.983 ; 19.914,117.577 20.523,117.577 21.285,118.339 ; 19.914,117.577 C11_U1.1@19.914,118.72 ; C11_U1.1@19.914,118.72 19.914,120.447 21.387,121.92 ; C11_U1.1@19.914,118.72 20.904,118.72 21.285,118.339 ; 21.285,118.339 21.387,118.44 21.387,121.92 ; 21.387,121.92 C6_U1.2@21.387,123.8 ; 21.387,121.92 21.438,121.971 ; C6_U1.2@21.387,123.8 C6_U1.2@21.438,123.8 ; C6_U1.2@21.387,123.8 C6_U1.2@21.438,123.85 ; 21.438,121.971 C6_U1.2@21.438,123.8 ; C6_U1.2@21.438,123.8 C6_U1.2@21.438,123.85 ; C6_U1.2@21.438,123.8 C5_U1.2@23.978,123.8 22.987,124.79 22.682,124.79 22.606,124.866 22.606,128.676 P2_U1.2@21.946,129.337 ; C6_U1.2@21.438,123.85 21.438,129.845 P2_U1.2@21.946,129.337 ; 44.577,112.471 45.06,112.471 v3@45.085,112.446 ; 44.577,112.471 44.577,114.427 ; 44.577,112.471 v3@45.085,112.979 ; 44.577,114.427 45.085,113.919 v3@45.085,112.979 ; v3@45.085,112.446 v3@45.085,112.979 ; 87.401,103.403 88.849,103.403 90.272,101.981 ; 87.401,103.403 88.824,101.981 ; 88.824,101.981 89.56,101.244 ; 88.824,101.981 90.272,101.981 ; 89.56,101.244 90.246,100.559 ; 89.56,101.244 89.56,96.774 89.814,96.52 91.846,96.52 ; 90.246,100.559 90.246,98.12 91.846,96.52 ; 90.246,100.559 90.246,101.956 90.272,101.981 ; 91.846,96.52 93.116,95.25 99.162,95.25 ; 91.846,96.52 95.733,96.52 ; 95.733,96.52 97.663,96.52 97.777,96.634 ; 95.733,96.52 96.345,97.132 96.345,98.067 ; 96.345,98.067 97.777,96.634 ; 97.777,96.634 99.162,95.25 ; 99.162,95.25 99.771,94.64 ; 99.771,94.64 99.771,93.701 101.295,92.177
  Bottom Layer w0.762: v1(29.337,105.232) 30.099,105.232 30.15,105.283 31.217,105.283 ; 30.734,106.756 29.82,105.842 ; 30.759,105.918 30.683,105.842 29.82,105.842 ; 29.82,105.842 29.477,105.499 29.4,105.499 29.743,105.842 29.82,105.842
  Bottom Layer w1.016: P4_U1.2@46.279,128.047 46.279,128.423 47.231,129.375 P4_U1.17@47.231,129.952
  other v1: 75.108,110.668
  other v3: 105.461,92.964 105.435,95.529
ISO_GND_U2: C5_U2.2 C6_U2.2 C7_U2.1 C8_U2.1 C9_U2.1 C10_U2.1 C11_U2.1 C34_U2.2 C35_U2.2 C41_U2.2 C42_U2.2 C49_U2.2 C50_U2.2 C66_U2.2 C67_U2.2 P2_U2.2 P4_U2.2 P4_U2.8 P4_U2.17 P4_U2.23 Q6_U2.2 R8_U2.1 R21_U2.1 R31_U2.2 R33_U2.2 R45_U2.1 R48_U2.2 R50_U2.2 R58_U2.1 R63_U2.2 R65_U2.2 T1_U2.4 U6_U2.15 U9_U2.15 U11_U2.15 U16_U2.4 | length 348.5
  Top Layer w0.762: 187.681,109.906 188.112,109.474 188.925,108.661 U6_U2.15@188.925,107.17 188.925,105.308 v1(188.9,105.283) ; C5_U2.2@227.406,109.474 227.406,109.245 228.778,107.874 v1@228.778,103.734
  Top Layer w1.27: 144.983,93.243 145.263,93.243 147.828,95.809 ; R21_U2.1@145.212,89.002 145.212,89.941 148.438,93.167 148.438,94.64 ; 146.761,93.497 148.438,95.174 ; 149.123,92.329 149.225,92.431 149.225,95.428 ; 149.225,97.257 149.225,96.266 ; 149.555,98.933 148.438,97.815 ; 150.089,96.291 149.225,95.428 ; 152.095,96.825 153.594,96.825 153.619,96.85 ; 153.213,97.003 155.829,97.003 ; 157.277,99.06 157.937,99.72 159.766,99.72 ; T1_U2.4@163.307,108.232 165.123,108.232 165.887,107.467 ; 165.557,98.044 165.557,98.654 168.072,101.168 ; 187.681,109.906 176.428,109.906 175.539,110.795 166.294,110.795 165.887,110.388 165.887,107.467 ; 188.112,109.474 188.112,111.404 188.824,112.116 R31_U2.2@192.634,112.116 194.361,112.116 C41_U2.2@194.97,112.725 C41_U2.2@194.92,112.776 ; C42_U2.2@194.945,110.439 C41_U2.2@194.945,112.522 ; v3(202.794,116.586) U16_U2.4@204.013,116.586 ; 206.781,105.029 208.509,105.029 208.509,103.937 v5@208.153,103.581 ; C6_U2.2@206.959,109.576 C6_U2.2@206.985,109.601 ; v5@208.509,103.581 v5@208.153,103.581 ; 208.509,105.156 U9_U2.15@208.509,107.17 ; 213.411,112.624 213.309,112.725 ; 213.462,114.427 R58_U2.1@214.859,114.427 ; P4_U2.2@213.718,129.952 213.718,129.324 213.147,128.753 213.147,128.301 212.893,128.047 212.893,124.698 213.309,124.282 213.309,112.725 ; C66_U2.2@213.893,111.785 208.153,111.785 ; C67_U2.2@214.224,110.134 213.309,111.049 213.309,112.725 ; C67_U2.2@214.401,109.728 C66_U2.2@214.401,111.862 ; v1@219.558,111.836 219.583,111.862 219.583,112.674 219.786,112.674 Q6_U2.2@219.812,112.7 ; R8_U2.1@226.187,113.462 226.187,109.957 C5_U2.2@226.365,109.779 ; 226.339,111.709 233.197,111.709 234.086,110.82 C49_U2.2@234.086,110.16 ; R63_U2.2@231.724,111.887 231.902,112.065 C50_U2.2@231.902,113.868 ; 147.828,95.809 148.438,96.418 ; 147.828,95.809 147.828,98.501 148.438,99.111 ; 148.438,94.64 149.225,95.428 ; 148.438,94.64 148.438,95.174 ; 148.438,95.174 148.438,95.479 ; 148.438,95.479 148.438,96.418 ; 148.438,95.479 149.225,96.266 ; 148.438,96.418 148.438,97.815 ; 148.438,97.815 148.438,99.111 ; 148.438,99.111 149.987,100.66 158.826,100.66 159.766,99.72 ; 149.225,95.428 149.225,96.266 ; 159.766,99.72 165.557,99.72 165.887,100.051 165.887,101.092 ; 165.887,101.092 165.887,103.022 ; 165.887,101.092 165.964,101.168 168.072,101.168 ; 165.887,103.022 166.573,102.337 ; 165.887,103.022 165.887,107.467 ; 166.573,102.337 167.488,101.422 170.104,101.422 R45_U2.1@170.256,101.27 ; 166.573,102.337 172.593,102.337 172.669,102.413 172.669,101.498 172.441,101.27 R45_U2.1@170.256,101.27 ; 168.072,101.168 169.291,101.168 ; 169.291,101.168 R45_U2.1@170.358,101.168 R45_U2.1@170.256,101.27 ; 169.291,101.168 169.393,101.27 R45_U2.1@170.256,101.27 ; C6_U2.2@206.985,109.601 206.985,109.525 205.664,108.204 v3(205.664,106.655) 205.664,106.07 v5@208.153,103.581 ; C6_U2.2@206.985,109.601 C6_U2.2@206.985,110.033 206.985,111.658 207.112,111.785 208.153,111.785 ; C6_U2.2@206.985,109.601 207.518,110.134 207.772,110.134 207.772,111.404 208.153,111.785
  Top Layer w2.032: C10_U2.1@227.838,124.866 227.838,132.385 v3(227.889,132.436)
  Bottom Layer w1.27: 187.249,103.378 v1@188.9,105.029 ; v1(188.9,105.283) v1@188.9,105.029 ; P4_U2.23@201.336,128.047 201.336,128.372 202.288,129.324 P4_U2.8@202.288,129.952 ; v3@202.743,116.586 v3(202.794,116.586) ; v5@208.636,103.581 v5(208.712,103.581) v1@228.498,103.581 ; v3@215.087,111.709 v1@219.354,111.709 ; v1@188.9,105.029 188.9,104.165 188.874,104.191 188.874,102.997 191.059,105.181 ; v1@188.9,105.029 189.052,105.181 191.059,105.181 ; 191.059,105.181 199.161,105.181 ; 199.161,105.181 200.939,105.181 202.438,106.68 202.463,106.655 203.302,106.655 ; 199.161,105.181 201.727,107.747 203.302,107.747 ; v3(202.794,116.586) 203.098,116.586 205.664,114.021 v3(205.664,106.655) 204.521,106.655 ; v3(202.794,116.586) 202.794,115.138 203.302,114.63 ; 203.302,106.655 203.302,107.747 ; 203.302,106.655 204.521,106.655 ; 203.302,107.747 203.302,114.63 ; 203.302,114.63 204.445,113.487 204.445,106.731 204.521,106.655
  Bottom Layer w2.032: P4_U2.8@202.288,129.952 202.288,132.006 202.87,132.588 214.401,132.588 ; P4_U2.2@213.718,129.952 213.766,130 213.766,131.953 214.401,132.588 ; P2_U2.2@238.455,129.921 238.455,128.397 236.677,126.619 232.131,126.619 230.2,128.549 230.2,130.073 227.686,132.588 214.401,132.588
  other v1: 228.752,103.734 219.558,111.684
  other v3: 185.928,101.625 185.953,102.972 214.96,111.862
NetC13_U1_1: C13_U1.1 D2_U1.2 L1_U1.2 U3_U1.8
NetC13_U1_2: C13_U1.2 U3_U1.1 | length 3
  Top Layer w0.762: 9.347,121.234 10.338,121.234 11.024,120.548 C13_U1.2@11.024,119.482
NetC13_U2_1: C13_U2.1 D2_U2.2 L1_U2.2 U3_U2.8 | length 3.2
  Top Layer w0.762: 241.579,120.675 242.443,119.812 242.443,119.126 242.748,118.821 242.849,118.923 243.535,118.923
NetC13_U2_2: C13_U2.2 U3_U2.1 | length 3
  Top Layer w0.762: U3_U2.1@237.287,118.542 237.693,118.542 237.82,118.669 237.82,119.355 238.684,120.218 239.192,120.218
NetC14_U1_1: C14_U1.1 R13_U1.1 R14_U1.2 U4_U1.5 | length 9.1
  Top Layer w0.762: U4_U1.5@106.655,121.615 108.712,121.615 C14_U1.1@108.991,121.895 R14_U1.2@108.991,124.079 108.991,126.746 108.229,127.508 R13_U1.1@107.493,127.508
NetC14_U2_1: C14_U2.1 R13_U2.1 R14_U2.2 U4_U2.5 | length 7.1
  Top Layer w0.381: U4_U2.5@166.294,118.821 168.707,118.821 ; C14_U2.1@168.707,117.856 168.707,118.821 ; 168.732,118.796 168.707,118.821 ; R14_U2.2@171.247,120.066 R13_U2.1@168.859,120.066 168.707,119.913 168.707,118.821
NetC23_U1_2: C23_U1.2 R19_U1.1 R22_U1.2 U3_U1.5 | length 14.2
  Top Layer w1.016: R22_U1.2@1.93,109.753 1.93,107.645 2.261,107.315 v1(4.826,107.315) C23_U1.2@5.893,107.315 ; v1(4.801,113.817) 4.801,114.224 4.775,114.249 4.851,114.325 5.029,114.325 5.232,114.529 U3_U1.5@5.232,115.037
  Bottom Layer w1.016: v1(4.801,113.817) 4.826,113.792 v1(4.826,107.315)
NetC23_U2_2: C23_U2.2 R19_U2.1 R22_U2.2 U3_U2.5 | length 16.1
  Top Layer w0.762: U3_U2.5@243.434,114.732 243.027,114.732 241.656,113.36 R22_U2.2@241.656,112.573 241.656,112.141 242.9,110.896 249.377,110.896 R19_U2.1@250.825,112.344
  Top Layer w1.27: R19_U2.1@250.825,112.344 C23_U2.2@250.825,114.63
NetC26_U1_2: C26_U1.2 U3_U1.4 | length 1.2
  Top Layer w1.27: C26_U1.2@3.683,121.59 4.648,121.59 4.826,121.412
NetC26_U2_2: C26_U2.2 U3_U2.4 | length 1.7
  Top Layer w0.762: C26_U2.2@237.312,112.751 237.312,114.478
NetC27_U1_2: C27_U1.2 C28_U1.2 U3_U1.6 | length 6.9
  Top Layer w0.762: U3_U1.6@6.502,115.037 6.502,113.868 6.909,113.462 7.798,113.462 8.026,113.233 8.026,112.319 8.382,111.963 C27_U1.2@8.788,111.963 8.788,109.83 C28_U1.2@8.763,109.804
NetC27_U2_2: C27_U2.2 C28_U2.2 U3_U2.6 | length 5.6
  Top Layer w0.762: U3_U2.6@243.434,116.002 244.856,116.002 245.923,117.069 C27_U2.2@246.431,117.069 C28_U2.2@248.564,117.069
NetC28_U1_1: C28_U1.1 R25_U1.2 | length 2.2
  Top Layer w0.762: R25_U1.2@4.242,109.753 4.293,109.804 C28_U1.1@6.375,109.804
NetC28_U2_1: C28_U2.1 R25_U2.2 | length 2.2
  Top Layer w1.27: R25_U2.2@248.463,112.522 248.564,112.624 C28_U2.1@248.564,114.681
NetC31_U1_1: C31_U1.1 R28_U1.2 R29_U1.1 | length 8.8
  Top Layer w0.381: C31_U1.1@98.171,122.174 98.171,119.075 99.136,118.11 101.702,118.11 102.768,119.177 R29_U1.1@102.768,119.456
NetC31_U2_1: C31_U2.1 R28_U2.2 R29_U2.1 | length 8.9
  Top Layer w0.381: C31_U2.1@157.048,116.738 157.048,115.849 157.556,115.341 161.188,115.341 161.519,115.672 161.519,116.688 R28_U2.2@161.544,116.713
  Top Layer w0.762: R28_U2.2@161.544,116.713 R29_U2.1@163.678,116.713
NetC32_U1_1: C32_U1.1 D7_U1.2 U6_U1.7 | length 17.2
  Top Layer w0.508: U6_U1.7@34.392,97.942 34.417,97.917 34.417,95.834 35.281,94.971 35.281,90.907 C32_U1.1@34.773,90.399
  Top Layer w1.016: U6_U1.7@34.392,97.942 34.392,99.898 34.544,100.051 36.398,100.051 37.109,99.339 37.109,98.044 37.922,97.231 D7_U1.2@39.573,97.231
NetC32_U2_1: C32_U2.1 D7_U2.2 U6_U2.7 | length 17.7
  Top Layer w0.762: C32_U2.1@194.97,88.113 195.275,88.417 195.275,91.11 195.275,93.853 U6_U2.7@195.275,96.52 U6_U2.7@195.275,96.723 ; D7_U2.2@199.492,95.707 197.841,95.707 197.612,95.936 197.612,97.714 196.901,98.425 195.885,98.425 195.351,97.892 ; U6_U2.7@195.275,96.723 195.351,96.799 195.351,97.892 ; U6_U2.7@195.275,96.723 195.275,97.815 195.351,97.892
NetC33_U1_1: C33_U1.1 R28_U1.1 U4_U1.3 | length 12.6
  Top Layer w0.381: R28_U1.1@100.559,119.558 100.559,119.888 99.162,121.285 99.162,122.453 99.593,122.885 U4_U1.3@100.508,122.885 102.21,122.885 102.87,123.546 102.87,126.136 101.803,127.203 C33_U1.1@100.889,127.203
NetC33_U2_1: C33_U2.1 R28_U2.1 U4_U2.3 | length 11.1
  Top Layer w0.381: R28_U2.1@159.156,116.713 158.648,117.221 158.648,119.736 159.004,120.091 U4_U2.3@160.147,120.091 161.442,120.091 162.154,120.802 C33_U2.1@162.154,124.689
NetC36_U1_1: C36_U1.1 C37_U1.1 P3_U1.1 T1_U1.1 | length 2.4
  Top Layer w0.762: C37_U1.1@90.195,94.132 90.195,91.999 C36_U1.1@90.399,91.796
NetC36_U1_2: C36_U1.2 C37_U1.2 P3_U1.2 T1_U1.3 | length 22.7
  Top Layer w1.27: C37_U1.2@87.808,94.132 87.808,86.665 89.052,85.42 P3_U1.2@93.294,85.42 93.548,85.674 95.555,85.674 96.345,86.464 T1_U1.3@96.345,92.227
NetC36_U2_1: C36_U2.1 C37_U2.1 P3_U2.1 T1_U2.1 | length 14.4
  Top Layer w1.27: T1_U2.1@170.307,105.232 C36_U2.1@173.152,105.232 179.299,105.232 182.22,108.153 P3_U2.1@183.515,108.153
NetC36_U2_2: C36_U2.2 C37_U2.2 P3_U2.2 T1_U2.3 | length 14.3
  Top Layer w1.27: T1_U2.3@170.282,108.232 177.924,108.232 v3(178.638,107.518)
  Bottom Layer w1.27: v3(178.638,107.518) 180.543,105.613 P3_U2.2@183.515,105.613
NetC45_U1_1: C45_U1.1 R43_U1.2 R44_U1.1 | length 9.3
  Top Layer w0.508: R44_U1.1@86.893,119.304 89.23,119.304 R43_U1.2@89.306,119.38
  Top Layer w0.762: C45_U1.1@93.777,119.405 94.336,119.405 v1(94.361,119.431)
  Bottom Layer w0.762: v1(88.113,119.38) 88.163,119.431 v1(94.361,119.431)
NetC45_U2_1: C45_U2.1 R43_U2.2 R44_U2.1 | length 5.1
  Top Layer w0.381: R43_U2.2@174.498,119.202 174.498,119.177 176.657,117.018 R44_U2.1@176.708,117.018 176.733,116.992 C45_U2.1@178.689,116.992
NetC46_U1_1: C46_U1.1 R43_U1.1 U8_U1.3 | length 10.8
  Top Layer w0.508: R43_U1.1@91.694,119.38 91.694,123.419 92.481,124.206 ; C46_U1.1@94.056,127.203 93.447,127.203 92.481,126.238 92.481,124.206 ; U8_U1.3@94.107,124.206 92.481,124.206
NetC46_U2_1: C46_U2.1 R43_U2.1 U8_U2.3 | length 4.9
  Top Layer w0.381: R43_U2.1@174.498,121.59 176.733,121.59 C46_U2.1@176.759,121.564 177.952,120.371 U8_U2.3@178.918,120.371
NetC47_U1_2: C47_U1.2 D12_U1.2 U9_U1.7 | length 16.3
  Top Layer w0.508: C47_U1.2@55.956,90.678 C47_U1.2@56.032,90.602
  Top Layer w1.016: C47_U1.2@55.956,90.678 55.956,96.037 55.397,96.596 U9_U1.7@55.397,97.942 55.397,99.314 56.007,99.924 57.404,99.924 57.963,99.365 57.963,97.917 58.598,97.282 D12_U1.2@60.477,97.282
NetC47_U2_2: C47_U2.2 D12_U2.2 U9_U2.7 | length 17.4
  Top Layer w0.508: U9_U2.7@214.859,96.52 214.859,95.326 215.824,94.361 C47_U2.2@215.824,88.24
  Top Layer w0.762: U9_U2.7@214.859,96.52 214.859,97.942 215.265,98.349 216.891,98.349 217.322,97.917 217.322,96.418 217.907,95.834 D12_U2.2@220.116,95.834
NetC48_U1_1: C48_U1.1 R56_U1.2 R57_U1.1 | length 5.4
  Top Layer w0.762: C48_U1.1@83.083,121.691 83.083,122.149 84.049,123.114 84.049,126.035 84.023,126.035 R56_U1.2@83.566,126.492
NetC48_U2_1: C48_U2.1 R56_U2.2 R57_U2.1 | length 4.8
  Top Layer w0.381: C48_U2.1@187.554,119.05 C48_U2.1@187.325,119.278 187.35,119.304 R57_U2.1@189.636,119.304 ; R56_U2.2@189.586,116.916 R57_U2.1@189.586,119.101
NetC53_U1_1: C53_U1.1 R56_U1.1 U8_U1.5 | length 4.9
  Top Layer w0.508: C53_U1.1@85.903,128.651 85.903,126.543 R56_U1.1@85.954,126.492
  Top Layer w0.762: R56_U1.1@85.954,126.492 85.954,125.908 86.385,125.476 U8_U1.5@87.96,125.476
NetC53_U2_1: C53_U2.1 R56_U2.1 U8_U2.5 | length 4.2
  Top Layer w0.381: U8_U2.5@185.064,119.101 185.344,118.821 C53_U2.1@185.344,116.992 R56_U2.1@187.325,116.992
NetC54_U1_2: C54_U1.2 D17_U1.2 U11_U1.7 | length 16.3
  Top Layer w0.762: C54_U1.2@76.606,90.424 76.606,95.656 75.108,97.155 U11_U1.7@75.108,97.968 75.108,99.365 75.489,99.746 76.987,99.746 77.394,99.339 77.394,98.222 78.156,97.46 D17_U1.2@80.061,97.46
NetC54_U2_2: C54_U2.2 D17_U2.2 U11_U2.7 | length 17.4
  Top Layer w0.508: U11_U2.7@235.128,96.495 235.128,95.733 237.134,93.726 C54_U2.2@237.134,88.214
  Top Layer w0.762: U11_U2.7@235.128,96.495 235.128,97.968 235.61,98.45 237.058,98.45 237.566,97.942 237.566,96.926 238.557,95.936 D17_U2.2@240.106,95.936
NetC61_U1_1: C61_U1.1 R69_U1.2 R70_U1.1 | length 4.5
  Top Layer w1.016: C61_U1.1@101.371,110.693 101.397,110.668 R70_U1.1@101.397,108.433 R69_U1.2@103.581,108.433
NetC61_U2_1: C61_U2.1 R69_U2.2 R70_U2.1 | length 4.4
  Top Layer w0.508: C61_U2.1@247.955,102.159 248.031,102.235 R69_U2.2@250.292,102.235 250.292,100.279 R70_U2.1@250.241,100.228
NetC64_U1_1: C64_U1.1 R69_U1.1 U13_U1.3 | length 7.6
  Top Layer w0.508: U13_U1.3@100.051,115.265 101.27,115.265 101.803,114.732 101.803,113.157 102.184,112.776 103.403,112.776 C64_U1.1@103.53,112.903
  Top Layer w1.016: C64_U1.1@103.53,112.903 103.581,112.852 R69_U1.1@103.581,110.82
NetC64_U2_1: C64_U2.1 R69_U2.1 U13_U2.3 | length 9.6
  Top Layer w0.762: R69_U2.1@250.292,104.623 250.292,104.47 252.4,102.362 253.898,102.362 254.025,102.489 U13_U2.3@254.025,103.962 254.025,105.181 255.067,106.223 C64_U2.1@255.067,106.807
NetC69_U1_2: C69_U1.2 R78_U1.1 R79_U1.2 U14_U1.2 V1_U1.3 | length 20
  Top Layer w0.381: U14_U1.2@16.51,88.163 16.51,85.801 C69_U1.2@16.459,85.75 17.45,84.76 V1_U1.3@17.45,81.966 ; V1_U1.3@17.551,82.067 20.472,79.146 20.472,75.692 19.05,74.27 R78_U1.1@19.05,72.746
  Top Layer w0.762: R79_U1.2@16.815,72.822 18.974,72.822 R78_U1.1@19.05,72.746
NetC69_U2_2: C69_U2.2 R78_U2.1 R79_U2.2 U14_U2.2 V1_U2.3 | length 20
  Top Layer w0.508: U14_U2.2@253.06,78.08 253.06,79.985 253.517,80.442 256.174,80.442 256.743,79.872 256.743,76.733 256.388,76.378 V1_U2.3@256.388,74.016
  Top Layer w0.762: R79_U2.2@249.758,72.771 251.866,72.771 C69_U2.2@251.917,72.72 251.917,75.133 R78_U2.1@251.993,75.209 251.993,75.362 253.06,76.429 U14_U2.2@253.06,78.08
NetD1_U1_2: D1_U1.2 R8_U1.2 | length 2.3
  Top Layer w1.016: D1_U1.2@17.678,111.811 17.78,111.709 R8_U1.2@19.939,111.709
NetD1_U2_2: D1_U2.2 R8_U2.2 | length 2.2
  Top Layer w1.27: D1_U2.2@226.06,117.958 226.06,115.976 R8_U2.2@226.187,115.849
NetD3_U1_2: D3_U1.2 R16_U1.1 | length 2.4
  Top Layer w1.016: R16_U1.1@1.422,102.718 3.531,102.718 D3_U1.2@3.708,102.54
NetD3_U2_2: D3_U2.2 R16_U2.1 | length 2.4
  Top Layer w1.27: D3_U2.2@258.547,119.431 258.547,117.043 R16_U2.1@258.572,117.018
NetD5_U1_1: D5_U1.1 Q2_U1.1 R27_U1.2 R30_U1.1 | length 24.1
  Top Layer w0.508: Q2_U1.1@25.12,74 Q2_U1.1@25.12,74.98 ; R27_U1.2@35.56,82.906 35.712,82.753 R30_U1.1@35.712,80.67 35.738,80.645 R30_U1.1@36,80.383 ; 36.805,78.613 36.881,78.689
  Top Layer w0.762: R30_U1.1@35.738,80.645 36.881,80.645 ; v1(36.906,77.114) 36.881,77.14 36.881,78.689 36.881,80.645 ; D5_U1.1@38.456,80.645 36.881,80.645
  Bottom Layer w0.762: Q2_U1.1@25.12,74 25.12,75.463 26.822,77.165 v1@36.957,77.165
NetD5_U1_2: D5_U1.2 R23_U1.2 | length 3.4
  Top Layer w0.508: D5_U1.2@38.456,84.945 39.218,85.707 R23_U1.2@39.218,88.011
NetD5_U2_1: D5_U2.1 Q2_U2.1 R27_U2.2 R30_U2.1 | length 19.6
  Top Layer w0.508: R27_U2.2@195.453,80.086 195.453,78.08 R30_U2.1@195.605,77.927 R30_U2.1@196.041,77.927 ; 196.113,78.232 196.041,78.16 R30_U2.1@196.041,77.927 ; D5_U2.1@198.298,78.181 198.044,77.927 R30_U2.1@196.041,77.927
  Top Layer w0.762: R30_U2.1@195.605,77.927 195.707,77.826 v1(195.707,76.479)
  Bottom Layer w0.762: Q2_U2.1@185.141,72.898 185.877,73.635 185.877,74.905 187.452,76.479 v1(195.707,76.479)
NetD5_U2_2: D5_U2.2 R23_U2.2 | length 3.5
  Top Layer w0.508: D5_U2.2@198.298,82.481 199.009,83.192 R23_U2.2@199.009,85.725
NetD6_U1_2: D6_U1.2 D7_U1.1 | length 2.1
  Top Layer w1.016: D7_U1.1@39.268,101.879 D6_U1.2@39.268,104.013
NetD6_U2_2: D6_U2.2 D7_U2.1 | length 2.2
  Top Layer w0.762: D7_U2.1@200.076,100.533 D6_U2.2@200.076,102.692
NetD8_U1_2: D8_U1.2 R34_U1.1 | length 3.9
  Top Layer w1.016: R34_U1.1@93.751,62.179 93.751,63.424 95.326,64.999 D8_U1.2@95.326,65.43